# Altium PCB Cube Power.PcbDoc
Units mm, origin at the board's own origin, x right, y up, seen from the top; angles counter-clockwise.
Board outline 24.89 x 38.78 mm, 2 copper layers (Top Layer, Bottom Layer); 29 components, 14 nets, 62 pads, 185 vias.
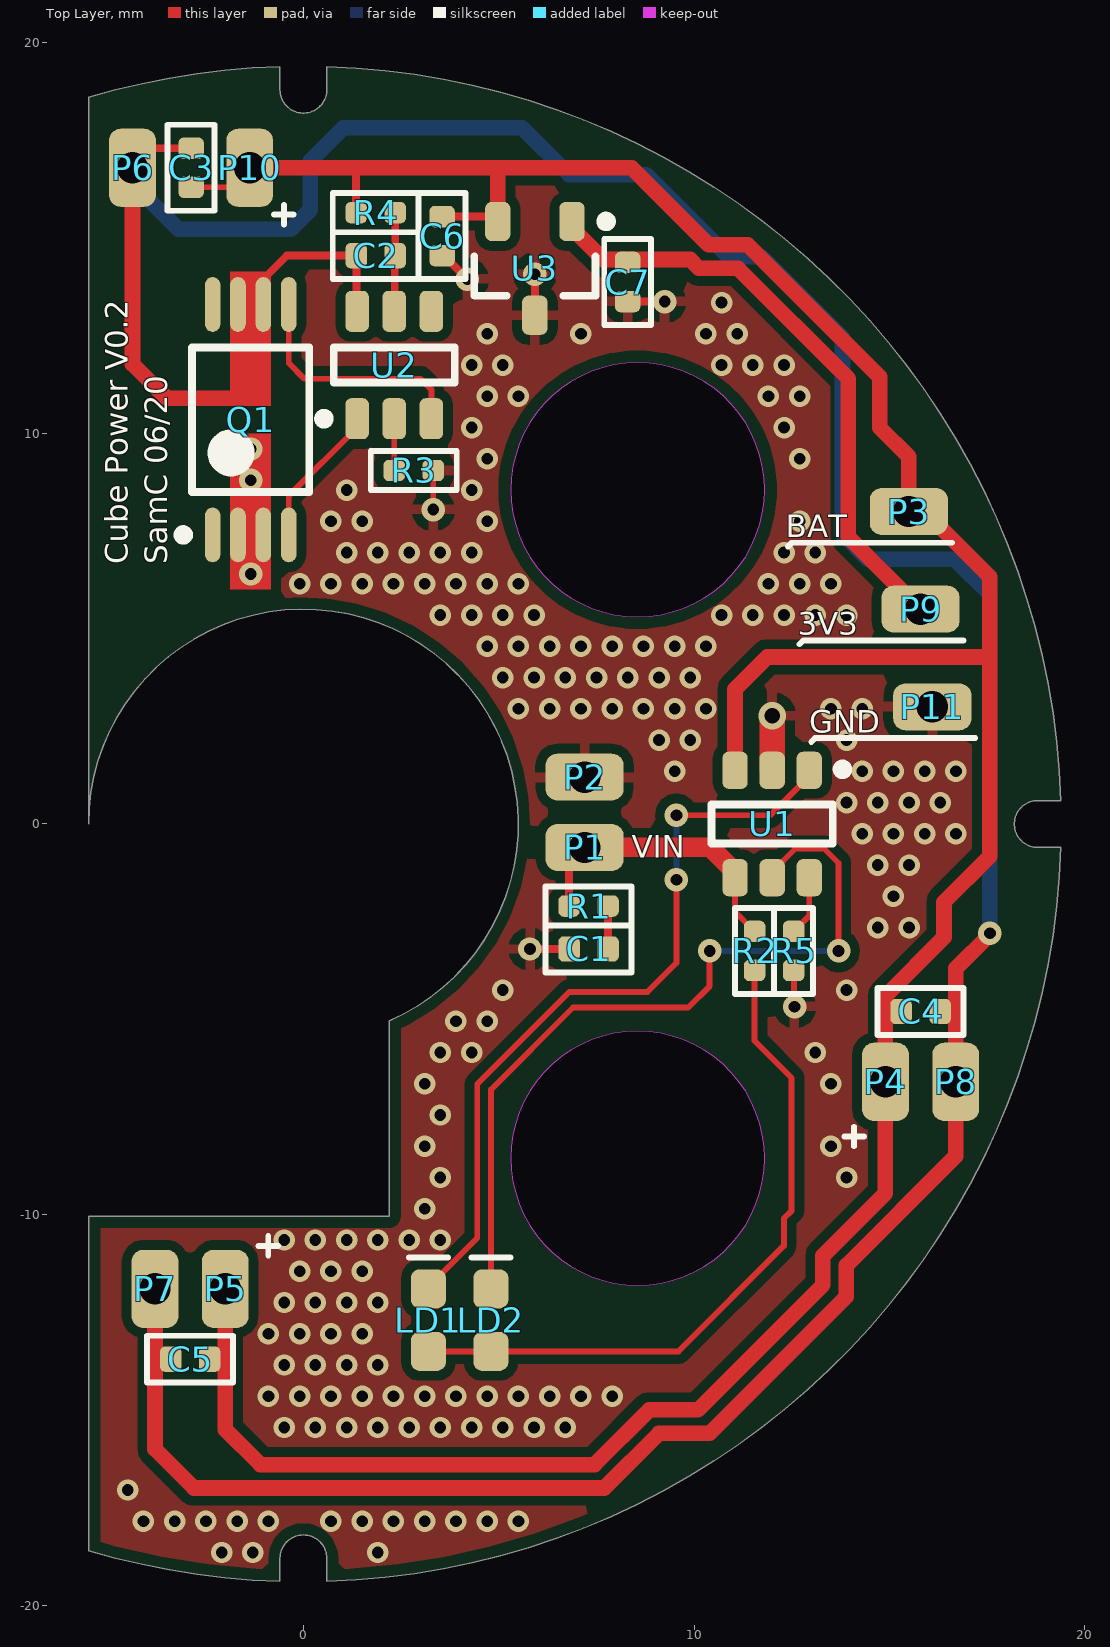
[diagram p0: Top Layer view]
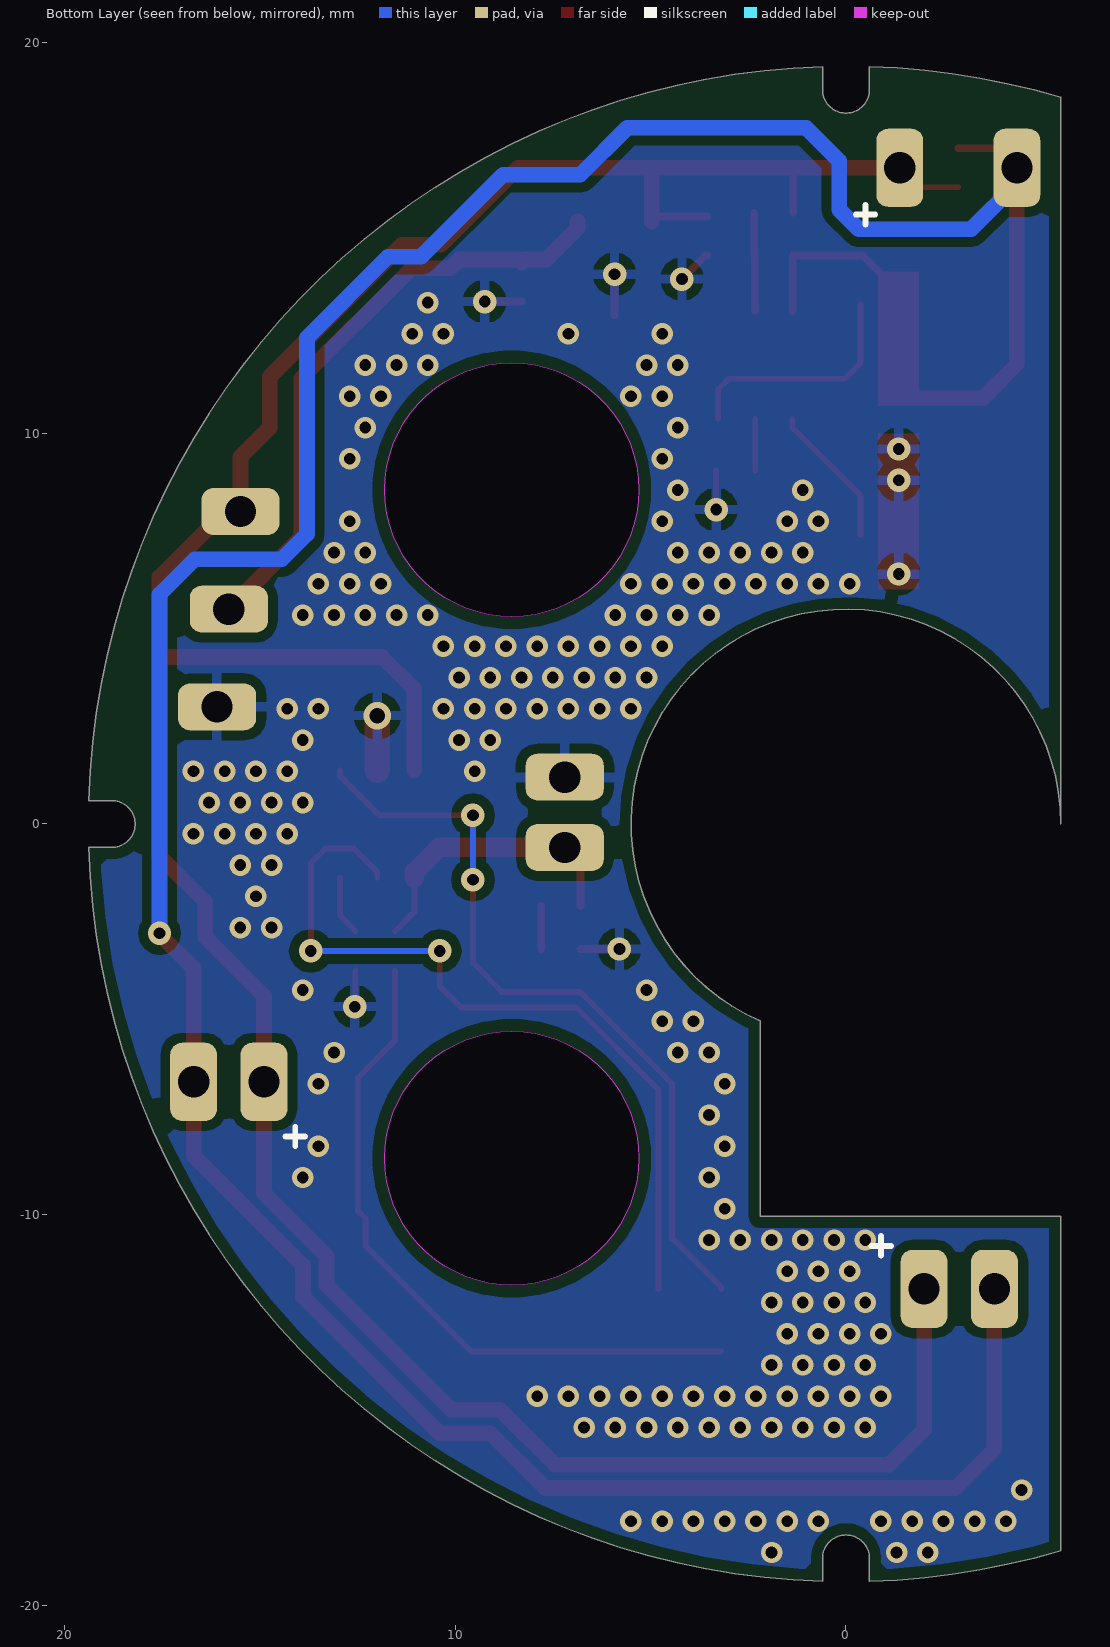
[diagram p1: Bottom Layer view, seen from below]
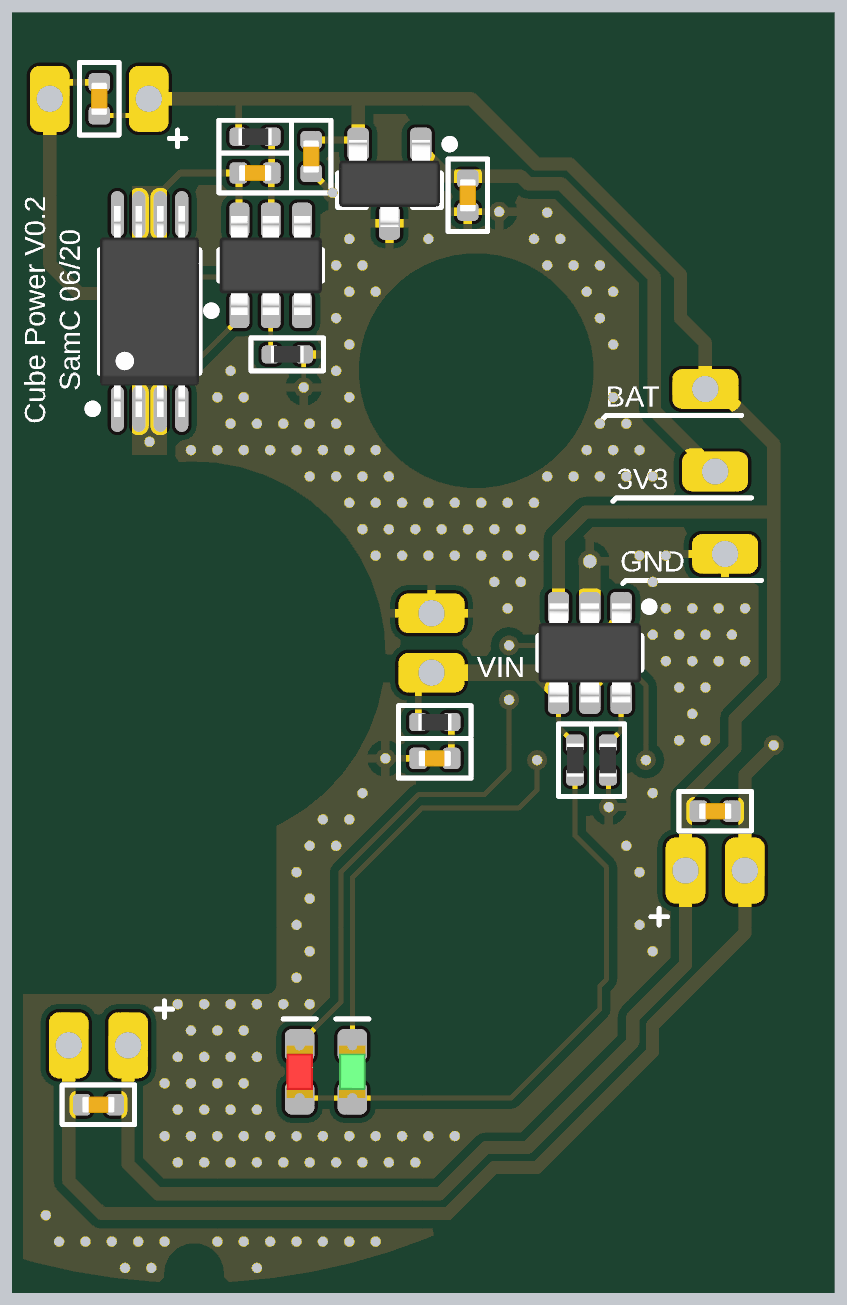
[diagram p2: 3D render of the assembled board from above, using the file's embedded part models]

## Layer stack, top to bottom
Top Solder: solder mask 0.0102, Solder Resist, Dk 3.5
Top Layer: signal copper 0.0356
Dielectric 1: dielectric 0.32, FR-4, Dk 4.8
Bottom Layer: signal copper 0.0356
Bottom Solder: solder mask 0.0102, Solder Resist, Dk 3.5

## Board outline
-0.6,-19.391 -0.6,-18.8 cw(c0,-18.8) 0.6,-18.8 0.6,-19.391 ccw(c0,0) 19.391,-0.6 18.8,-0.6 cw(c18.8,0) 18.8,0.6 19.391,0.6 ccw(c0,0) 0.6,19.391 0.6,18.8 cw(c0,18.8) -0.6,18.8 -0.6,19.391 ccw(c0,0) -5.5,18.604 -5.5,0 cw(c0,0) 2.2,-5.041 2.2,-10.041 -5.5,-10.041 -5.5,-18.604 ccw(c0,0)
cut-out: 5.306,-8.556 ccw(c8.556,-8.556) 8.556,-11.806 ccw(c8.556,-8.556) 11.806,-8.556 ccw(c8.556,-8.556) 8.556,-5.306 ccw(c8.556,-8.556)
cut-out: 5.306,8.556 ccw(c8.556,8.556) 8.556,5.306 ccw(c8.556,8.556) 11.806,8.556 ccw(c8.556,8.556) 8.556,11.806 ccw(c8.556,8.556)

## Design rules (kind name [scope] priority, off if disabled: settings)
BoardOutlineClearance [All] p1: gap=0.3 ignorepadtopadclearanceinfootprint=FALSE
Clearance [All] p1: gap=0.25 ignorepadtopadclearanceinfootprint=FALSE except(0.2: Arc-Arc Arc-Track Arc-SMDPad Arc-THPad Arc-Via Arc-Text Arc-Hole Track-Track Track-SMDPad Track-THPad Track-Via Track-Text Track-Hole SMDPad-SMDPad SMDPad-THPad SMDPad-Via SMDPad-Text SMDPad-Hole THPad-THPad THPad-Via THPad-Text THPad-Hole Via-Via Via-Text Via-Hole Text-Text Text-Hole)
DiffPairsRouting [All] p1: maxlimit=0.5 minlimit=0.15 mostfreqgap=0.2 toplayer_minwidth=0.15 toplayer_maxwidth=1 toplayer_prefwidth=0.2 bottomlayer_minwidth=0.15 bottomlayer_maxwidth=1 bottomlayer_prefwidth=0.2 maxuncoupledlength=12.7
HoleSize [All] p1: absolutevalues=TRUE maxlimit=6 minlimit=0.025 maxpercent=80.000 minpercent=20.000
MinimumSolderMaskSliver [All] p1: minsoldermaskwidth=0
PlaneClearance [All] p1: clearance=0.5
PlaneConnect [All] p1: planeconnectstyle=Relief reliefexpansion=0.5 reliefentries=4 reliefconductorwidth=0.25 reliefairgap=0.25
PolygonConnect [All] p1: connectstyle=Relief reliefconductorwidth=0.25 reliefentries=4 polygonreliefangle="90 Angle" airgapwidth=0.25
RoutingVias [All] p1: holewidth=0.3 width=0.6 viastyle="Through Hole" minholewidth=0.3 minwidth=0.5 maxholewidth=0.6 maxwidth=7
SilkToSilkClearance [All] p1: silktosilkclearance=0
SilkToSolderMaskClearance [IsPad] p1: minsilkscreentomaskgap=0 clearancetoexposedcopper=TRUE
SolderMaskExpansion [All] p1: expansion=0.102 istentingtop=FALSE
Width [All] p1: maxlimit=20 minlimit=0.15 preferedwidth=0.2
23 further rules are at their usual default settings.

## Components (designator, comment, footprint, x,y, rotation, side; value= is the part's Value field where it differs from the comment)
C1 "4.7uF" CAPC0402X05N 7.3,-3.2 r180 top
C2 "100nF" CAPC0402X05N 1.85,14.55 r180 top
C3 "10uF" CAPC0402X05N -2.875,16.8 r90 top
C4 "10uF" CAPC0402X05N 15.8,-4.8 r0 top
C5 "10uF" CAPC0402X05N -2.9,-13.7 r180 top
C6 "4.7uF" CAPC0402X05N 3.55,15.05 r270 top
C7 "4.7uF" CAPC0402X05N 8.3,13.875 r270 top
LD1 "Red" LEDM0603X08N_RED 3.2,-12.7 r90 top
LD2 "Green" LEDM0603X08N_GREEN 4.8,-12.7 r90 top
P1 "PAD_2" BATT_PAD#1 7.2,-0.625 r90 top
P2 "PAD_2" BATT_PAD#2 7.2,1.2 r90 top
P3 "PAD_2" BATT_PAD#3 15.475,7.95 r270 top
P4 "PAD_2" BATT_PAD#2 14.9,-6.6 r0 top
P5 "PAD_2" BATT_PAD#2 -2,-11.9 r0 top
P6 "PAD_2" BATT_PAD#2 -4.375,16.8 r0 top
P7 "PAD_2" BATT_PAD#2 -3.8,-11.9 r0 top
P8 "PAD_2" BATT_PAD#2 16.7,-6.6 r0 top
P9 "PAD_2" BATT_PAD#4 15.525,6.15 r90 top
P10 "PAD_2" BATT_PAD#2 -1.375,16.8 r0 top
P11 "PAD_2" BATT_PAD#5 15.6,4.275 r270 top
Q1 "FS8205A" FS8205A -1.35,10.35 r90 top
R1 "1R0" RESC0402X04N 7.3,-2.1 r180 top
R2 "330R" RESC0402X04N 11.55,-3.25 r90 top
R3 "2.7K" RESC0402X04N 2.825,9.05 r180 top
R4 "330R" RESC0402X04N 1.85,15.65 r180 top
R5 "12K" RESC0402X04N 12.55,-3.25 r270 top
U1 "SE9017-HF" SE9017-HF 12,0 r270 top locked
U2 "AP9101CAK6-ANTRG1" AP9101CAK6 2.325,11.75 r90 top
U3 "MCP1812AT-033/TT" MCP1812AT-033/TT 5.925,14.225 r270 top

## Footprints (in the part's own frame and the unit in brackets; to place one, negate y for a bottom-side part, rotate by r counter-clockwise, add the part's x,y. Pads: shape width x height; smd on the part's side, far side on the other; paste and mask are expansions set on the pad)
AP9101CAK6 [mm] "SOT23, 6-Leads, Body 3.00x2.85mm, Pitch 0.95mm, IPC Medium Density"
  rrect50% 1.05x0.6 smd: 1(-1.375,0.95) 2(-1.375,0) 3(-1.375,-0.95) 4(1.375,-0.95) 5(1.375,0) 6(1.375,0.95)
  silkscreen extent -1.5,-1.55 0.45,1.92, body extent -1.5,-1.55 1.5,1.55, height 1.4
BATT_PAD#1 [mm]
  rrect50% 1.2x2 hole 0.8: 1(0.025,0)
BATT_PAD#2 [mm]
  rrect50% 1.2x2 hole 0.8: 1(0,0)
BATT_PAD#3 [mm]
  rrect50% 1.2x2 hole 0.8: 1(-0.05,0.025)
BATT_PAD#4 [mm]
  rrect50% 1.2x2 hole 0.8: 1(-0.65,-0.275)
BATT_PAD#5 [mm]
  rrect50% 1.2x2 hole 0.8: 1(1.275,0.5)
CAPC0402X05N [mm] "Chip Capacitor, 2-Leads, Body 1.00x0.50mm, IPC Medium Density"
  rrect50% 0.55x0.65 smd: 1(-0.5,0) 2(0.5,0)
  silkscreen extent -1.1,-0.6 1.1,0.6, body extent -0.5,-0.25 0.5,0.25, height 0.5
FS8205A [mm] "TSOP, 8-Leads, Body 2.93x4.40mm, Pitch 0.65mm, IPC Medium Density"
  oval 1.4x0.4 smd: 1(-2.95,0.975) 2(-2.95,0.325) 3(-2.95,-0.325) 4(-2.95,-0.975) 5(2.95,-0.975) 6(2.95,-0.325) 7(2.95,0.325) 8(2.95,0.975)
  silkscreen extent -3.07,-1.5 1.85,1.85, body extent -3.2,-1.5 3.2,1.5, height 1.2
LEDM0603X08N_GREEN [mm] "0603 chip LED"
  rrect50% 1x0.9 smd: 1(-0.8,0) 2(0.8,0)
  silkscreen extent 1.5,-0.53 1.6,0.5, body extent -0.8,-0.4 0.8,0.4, height 0.8
LEDM0603X08N_RED [mm] "0603 chip LED"
  rrect50% 1x0.9 smd: 1(-0.8,0) 2(0.8,0)
  silkscreen extent 1.5,-0.53 1.6,0.5, body extent -0.8,-0.4 0.8,0.4, height 0.8
MCP1812AT-033/TT [mm] "SOT23, 3-Leads, Body 2.00x2.10mm, Pitch 0.65mm, IPC Medium Density"
  rrect50% 1x0.65 smd: 1(-1.2,0.95) 2(-1.2,-0.95) 3(1.2,0)
  silkscreen extent -1.32,-1.55 0.7,1.95, body extent -1.32,-1.53 1.32,1.53, height 1.12
RESC0402X04N [mm] "Chip Resistor, 2-Leads, Body 1.00x0.50mm, IPC Medium Density"
  rrect50% 0.55x0.55 smd: 1(-0.5,0) 2(0.5,0)
  silkscreen extent -1.1,-0.5 1.1,0.5, body extent -0.5,-0.25 0.5,0.25, height 0.35
SE9017-HF [mm] "SOT23, 6-Leads, Body 2.90x2.80mm, Pitch 0.95mm, IPC Medium Density"
  rrect50% 0.95x0.65 smd: 1(-1.375,0.95) 2(-1.375,0) 3(-1.375,-0.95) 4(1.375,-0.95) 5(1.375,0) 6(1.375,0.95)
  silkscreen extent -1.52,-1.55 0.5,1.92, body extent -1.5,-1.55 1.5,1.55, height 1.3

## Part data
C1 C6 C7: library part "CER 4.7UF 10V", "CAP CER 4.7UF 10V X5R 0402", Manufacturer="Samsung Electro-Mechanics", Manufacturer Part Number=CL05A475MP5NRNC, Package / Case=0402, Supplier Part Number 1=C23733, Voltage - Rated=10V, Capacitance=4.7uF, Category=Capacitors, Supplier 1=LCSC
C2: library part "CER 100NF 16V", "CAP CER 0.1UF 16V X7R 0402", Manufacturer="Samsung Electro-Mechanics", Manufacturer Part Number=CL05B104KO5NNNC, Package / Case=0402, Supplier Part Number 1=C1525, Voltage - Rated=16V, Capacitance=100nF, Category=Capacitors, Supplier 1=LCSC
C3 C4 C5: library part "CER 10UF 10V", "CAP CER 10UF 10V X5R 0402", Manufacturer="Murata Electronics", Manufacturer Part Number=GRM155R61A106ME44D, Package / Case=0402, Supplier Part Number 1=C77000, Voltage - Rated=10V, Capacitance=10uF, Category=Capacitors, Supplier 1=LCSC
LD1: library part "LED 0603 RED", "LED RED CLEAR CHIP SMD", Manufacturer="Lite-On Inc.", Manufacturer Part Number=LTST-C190KRKT, Package / Case="0603 (1608 Metric)", Supplier Part Number 1=C94869, Category=LED, Color=Red, Supplier 1=LCSC
LD2: library part "LED 0603 GREEN", "LED GREEN CLEAR CHIP SMD", Manufacturer="Lite-On Inc.", Manufacturer Part Number=LTST-C190KGKT, Package / Case="0603 (1608 Metric)", Supplier Part Number 1=C125094, Category=LED, Color=Green, Supplier 1=LCSC
P1 P2 P3 P4 P5 P6 P7 P8 P9 P10 P11: "a Pad"
Q1: "MOSFET 2N-CH 20V 6A TSSOP8", Case=TSSOP-8, Manufacturer="Fortune Semicon", Supplier Part Number 1=C16052, Category=Transistors, Manufacturer Part Number=FS8205A, Supplier 1=LCSC
R1: library part "RES 1R", "RES SMD 11RK OHM 1% 1/16W 0402", Manufacturer=YAGEO, Manufacturer Part Number=RC0402FR-071RL, Package / Case=0402, Supplier Part Number 1=C185446, Category=Resistors, Resistance=1R0, Supplier 1=LCSC
R2 R4: library part "RES 330R", "RES SMD 330R OHM 1% 1/16W 0402", Manufacturer=YAGEO, Manufacturer Part Number=RC0402FR-07330RL, Package / Case=0402, Supplier Part Number 1=C105875, Category=Resistors, Resistance=330R, Supplier 1=LCSC
R3: library part "RES 2.7K", "RES SMD 2.7K OHM 1% 1/16W 0402", Manufacturer=YAGEO, Manufacturer Part Number=AC0402FR-072K7L, Package / Case=0402, Supplier Part Number 1=C144771, Category=Resistors, Resistance=2.7K, Supplier 1=LCSC
R5: library part "RES 12K", "RES SMD 12K OHM 1% 1/16W 0402", Manufacturer=YAGEO, Manufacturer Part Number=RC0402FR-0712KL, Package / Case=0402, Supplier Part Number 1=C114760, Category=Resistors, Resistance=12K, Supplier 1=LCSC
U1: "IC LI-ION/LI-POLY CTRLR SOT23-6", Case=SOT-23-6, Manufacturer="Seaward Elec", Supplier Part Number 1=C115751, Category="PMIC - Battery Chargers", Manufacturer Part Number=SE9017-HF, Supplier 1=LCSC
U2: "IC BATT PROT LI-ION 1-CELL SOT26", Case=SOT-23-6, Manufacturer="Diodes Incorporated", Supplier Part Number 1=AP9101CAK6-ANTRG1DICT-ND, Category="PMIC - Battery Management", Manufacturer Part Number=AP9101CAK6-ANTRG1, Supplier 1=Digi-Key
U3: "IC REG LINEAR 3.3V 300MA SOT23-3", Case="TO-236-3, SC-59, SOT-23-3", Manufacturer="Microchip Technology", Supplier Part Number 1=MCP1812AT-033/TTCT-ND, Categories="Voltage Regulators - Linear", Manufacturer Part Number=MCP1812AT-033/TT, Supplier 1=Digi-Key

## Via types
v1: diameter 0.55, hole 0.3, Top Layer to Bottom Layer, tented both sides, 170 vias
v2: diameter 0.6, hole 0.3, Top Layer to Bottom Layer, tented both sides, 14 vias
v3: diameter 0.7, hole 0.4, Top Layer to Bottom Layer, tented both sides, 1 vias

## Nets (pads, with @x,y where several pads share a name; then routed paths per layer and width w, separated by ;. In a path a pad name is that pad's centre, name@x,y a point inside that pad or via, vN(x,y) a via of type N, cw(c..) or ccw(c..) an arc to the next point about the centre after c; other vN are vias at no path point)
BATT+: C3.1 C4.1 C5.1 C6.1 P3.1 P4.1 P5.1 P10.1 R4.2 U1.3 U3.2 | length 80.6
  Top Layer w0.15: C3.1 -1.875,16.3 P10.1
  Top Layer w0.2: R4.2 1.35,16.8 ; C6.1 4.85,15.55 U3.2
  Top Layer w0.4: P5.1 -2,-15.5 -1.1,-16.4 7.451,-16.4 8.851,-15 10.1,-15 13.3,-11.8 13.3,-11.051 14.9,-9.451 P4.1 14.9,-4.4 16.4,-2.9 16.4,-2 17.575,-0.825 17.575,4.275 ; P10.1 1.35,16.8 5,16.8 ; U3.2 4.975,16.775 5,16.8 ; U1.3 11.05,3.45 11.875,4.275 17.575,4.275 ; 5,16.8 8.4,16.8 10.375,14.825 11.375,14.825 14.75,11.45 14.75,10.15 15.5,9.4 P3.1 15.9,8 17.575,6.325 17.575,4.275
BATT-: C2.2 C3.2 C4.2 C5.2 P6.1 P7.1 P8.1 Q1.6 Q1.7 U2.6 | length 91.6
  Top Layer w0.2: P6.1 -4.375,16.815 -3.89,17.3 C3.2 ; -1.3,13.55 -1.3,13.675 -0.425,14.55 C2.2 ; C2.2@1.35,14.575 C2.2 ; U2.6 1.362,13.137 1.362,14.537 C2.2 ; P8.1@16.4,-6.3 P8.1
  Top Layer w0.4: P6.1 -4.375,11.775 -3.5,10.9 -1.325,10.9 ; P7.1 -3.8,-16 -2.8,-17 7.7,-17 9.1,-15.6 10.4,-15.6 13.9,-12.1 13.9,-11.3 16.7,-8.5 P8.1 16.7,-3.7 v2@17.6,-2.8
  Bottom Layer w0.4: P6.1 -4.375,16.4 -3.2,15.225 -0.325,15.225 0.175,15.725 0.175,16.975 1.025,17.825 5.6,17.825 6.8,16.625 8.775,16.625 10.875,14.525 11.725,14.525 13.8,12.45 13.8,7.425 14.45,6.775 16.675,6.775 17.575,5.875 17.575,-2.775 v2@17.6,-2.8 ; P8.1 P8.1@16.8,-6.5
  other v2: 17.575,-2.8
CHRG: LD1.2 U1.1 | length 19.9
  Top Layer w0.15: LD1.2 3.2,-11.85 4.45,-10.6 4.45,-6.655 6.805,-4.3 8.805,-4.3 9.55,-3.555 v2(9.55,-1.425) ; v2(9.55,0.225) 11.95,0.225 12.95,1.225 U1.1
  Bottom Layer w0.15: v2(9.55,-1.425) v2(9.55,0.225)
CHRGT: LD2.2 U1.5 | length 20.5
  Top Layer w0.15: LD2.2 4.8,-6.8 6.9,-4.7 9.85,-4.7 10.4,-4.15 v2(10.4,-3.25) ; U1.5 12,-1.225 12.6,-0.625 13.325,-0.625 13.7,-1 v2(13.7,-3.25)
  Bottom Layer w0.15: v2(10.4,-3.25) v2(13.7,-3.25)
CO: Q1.5 U2.3 | length 6.2
  Top Layer w0.15: Q1.5 -0.375,11.8 0.025,11.4 3,11.4 3.275,11.125 U2.3
DO: Q1.4 U2.1 | length 3.7
  Top Layer w0.15: Q1.4 -0.375,8.4 1.375,10.15 U2.1
GND: C1.2 C6.2 C7.2 P2.1 P11.1 Q1.2 Q1.3 R3.1 R5.2 U1.2 U3.3 | length 7.2
  Top Layer w0.15: v2(3.325,8.05) R3.1 ; R5.2 12.562,-3.763 12.562,-4.663 v2(12.575,-4.675)
  Top Layer w0.2: C6.2 3.6,14.55 v2(4.2,13.95) ; v2(5.8,-3.2) C1.2 ; U3.3 v2(5.925,14.075) ; C7.2 v2(9.25,13.375)
  Top Layer w0.65: U1.2 v3(12,2.775)
  other v1: -2.094,-18.65 -1.294,-18.65 1.906,-18.65 -4.094,-17.85 -3.294,-17.85 -2.494,-17.85 -1.694,-17.85 -0.894,-17.85 0.706,-17.85 1.506,-17.85 2.306,-17.85 3.106,-17.85 3.906,-17.85 4.706,-17.85 5.506,-17.85 -4.494,-17.05 -0.494,-15.45 0.306,-15.45 1.106,-15.45 1.906,-15.45 2.706,-15.45 3.506,-15.45 4.306,-15.45 5.106,-15.45 5.906,-15.45 6.706,-15.45 -0.894,-14.65 -0.094,-14.65 0.706,-14.65 1.506,-14.65 2.306,-14.65 3.106,-14.65 3.906,-14.65 4.706,-14.65 5.506,-14.65 6.306,-14.65 7.106,-14.65 7.906,-14.65 -0.494,-13.85 0.306,-13.85 1.106,-13.85 1.906,-13.85 -0.894,-13.05 -0.094,-13.05 0.706,-13.05 1.506,-13.05 -0.494,-12.25 0.306,-12.25 1.106,-12.25 1.906,-12.25 -0.094,-11.45 0.706,-11.45 1.506,-11.45 -0.494,-10.65 0.306,-10.65 1.106,-10.65 1.906,-10.65 2.706,-10.65 3.506,-10.65 3.106,-9.85 3.506,-9.05 13.906,-9.05 3.106,-8.25 13.506,-8.25 3.506,-7.45 3.106,-6.65 13.506,-6.65 3.506,-5.85 4.306,-5.85 13.106,-5.85 3.906,-5.05 4.706,-5.05 5.106,-4.25 13.906,-4.25 14.706,-2.65 15.506,-2.65 15.106,-1.85 14.706,-1.05 15.506,-1.05 14.306,-0.25 15.106,-0.25 15.906,-0.25 16.706,-0.25 13.906,0.55 14.706,0.55 15.506,0.55 16.306,0.55 9.506,1.35 14.306,1.35 15.106,1.35 15.906,1.35 16.706,1.35 9.106,2.15 9.906,2.15 13.906,2.15 5.506,2.95 6.306,2.95 7.106,2.95 7.906,2.95 8.706,2.95 9.506,2.95 10.306,2.95 13.506,2.95 14.306,2.95 5.106,3.75 5.906,3.75 6.706,3.75 7.506,3.75 8.306,3.75 9.106,3.75 9.906,3.75 4.706,4.55 5.506,4.55 6.306,4.55 7.106,4.55 7.906,4.55 8.706,4.55 9.506,4.55 10.306,4.55 3.506,5.35 4.306,5.35 5.106,5.35 5.906,5.35 10.706,5.35 11.506,5.35 12.306,5.35 13.106,5.35 13.906,5.35 -0.094,6.15 0.706,6.15 1.506,6.15 2.306,6.15 3.106,6.15 3.906,6.15 4.706,6.15 5.506,6.15 11.906,6.15 12.706,6.15 13.506,6.15 1.106,6.95 1.906,6.95 2.706,6.95 3.506,6.95 4.306,6.95 12.306,6.95 13.106,6.95 0.706,7.75 1.506,7.75 4.706,7.75 12.706,7.75 1.106,8.55 4.306,8.55 4.706,9.35 12.706,9.35 4.306,10.15 12.306,10.15 4.706,10.95 5.506,10.95 11.906,10.95 12.706,10.95 4.306,11.75 5.106,11.75 10.706,11.75 11.506,11.75 12.306,11.75 4.706,12.55 7.106,12.55 10.306,12.55 11.106,12.55 10.706,13.35
  other v2: -1.35,6.4 -1.35,8.8 -1.35,9.6
LED_CHRG: LD1.1 LD2.1 R2.1 | length 17.7
  Top Layer w0.15: LD1.1 LD2.1 9.6,-13.5 12.3,-10.8 12.3,-10.1 12.5,-9.9 12.5,-6.5 11.55,-5.55 R2.1
NetC1_1: C1.1 R1.1 | length 1.1
  Top Layer w0.2: C1.1 R1.1
R_PROG: R5.1 U1.6 | length 1.5
  Top Layer w0.15: R5.1 12.95,-2.35 U1.6
U2_VDD: C2.1 R4.1 U2.5 | length 2.5
  Top Layer w0.2: U2.5 2.338,13.137 2.338,14.537 C2.1 R4.1
VDD_3V3: C7.1 P9.1 U3.1 | length 15.6
  Top Layer w0.4: U3.1 6.875,15.25 7.675,14.45 8.225,14.45 C7.1 8.375,14.45 9.901,14.45 10.126,14.225 11.126,14.225 13.95,11.401 13.95,7.35 P9.1
VIN: P1.1 R1.2 R2.2 U1.4 | length 7.5
  Top Layer w0.15: U1.4 11.05,-2.25 R2.2
  Top Layer w0.2: R1.2 6.8,-1 P1.1
  Top Layer w0.5: P1.1 10.425,-0.6 11.05,-1.225 U1.4
VM: R3.2 U2.2 | length 1.3
  Top Layer w0.15: R3.2 U2.2
pads on no net: Q1.1 Q1.8 U2.4

## Polygon pours and split planes (outlines as drawn)
GND on Top Layer "GND_L01_P000" (solid, remove dead copper, pour order 0): -7.45,21.325 -7.65,21.125 -7.65,-21.075 25.05,-21.075 27.975,-18.15 25.375,-15.55 25.375,21.225
GND on Bottom Layer "GND_L02_P001" (solid, remove dead copper, pour order 1): -7.45,21.325 -7.65,21.125 -7.65,-21.075 25.05,-21.075 27.975,-18.15 25.375,-15.55 25.375,21.225

## Other copper
Top Layer:
  rectangle net BATT-: -1.875,10.7 -0.825,14.15
  rectangle net GND: -1.875,6 -0.825,10

## Silkscreen, mask and mechanical layers (free items; w line width, h text height)
Top Overlay:
  lines w0.15: -1.15,-10.8 -0.65,-10.8 ; -0.9,-11.05 -0.9,-10.55 ; -0.75,15.6 -0.25,15.6 ; -0.5,15.35 -0.5,15.85 ; 12.4,7.1 12.5,7.2 16.6,7.2 ; 12.7,4.6 12.8,4.7 16.9,4.7 ; 13,2.1 13.1,2.2 17.2,2.2 ; 13.85,-8 14.35,-8 ; 14.1,-8.25 14.1,-7.75
  text "BAT" at 12.35,7.15 h1
  text "Cube Power V0.2 / SamC 06/20" at -3.3,6.65 h1 r90
  text "3V3" at 12.65,4.65 h1
  text "GND" at 12.95,2.15 h1
  text "VIN" at 8.4,-1.05 h1
Bottom Overlay:
  lines w0.15: -1.15,-10.8 -0.65,-10.8 ; -0.9,-11.05 -0.9,-10.55 ; -0.75,15.6 -0.25,15.6 ; -0.5,15.35 -0.5,15.85 ; 13.85,-8 14.35,-8 ; 14.1,-8.25 14.1,-7.75
Mechanical 1:
  circle w0.8: c8.556,-8.556 r3.25
  circle w0.8: c8.556,8.556 r3.25
  lines w0.8: -5.5,-18.604 ccw(c0,0) -0.6,-19.391 -0.6,-18.8 cw(c0,-18.8) 0.6,-18.8 0.6,-19.391 ccw(c0,0) 19.391,-0.6 18.8,-0.6 cw(c18.8,0) 18.8,0.6 19.391,0.6 ccw(c0,0) 0.6,19.391 0.6,18.8 cw(c0,18.8) -0.6,18.8 -0.6,19.391 ccw(c0,0) -5.5,18.604 -5.5,0 cw(c0,0) 2.2,-5.041 2.2,-10.041 -5.5,-10.041 -5.5,-18.604